# EAGLE board ws2812_Triangle (EAGLE 8.7.1)
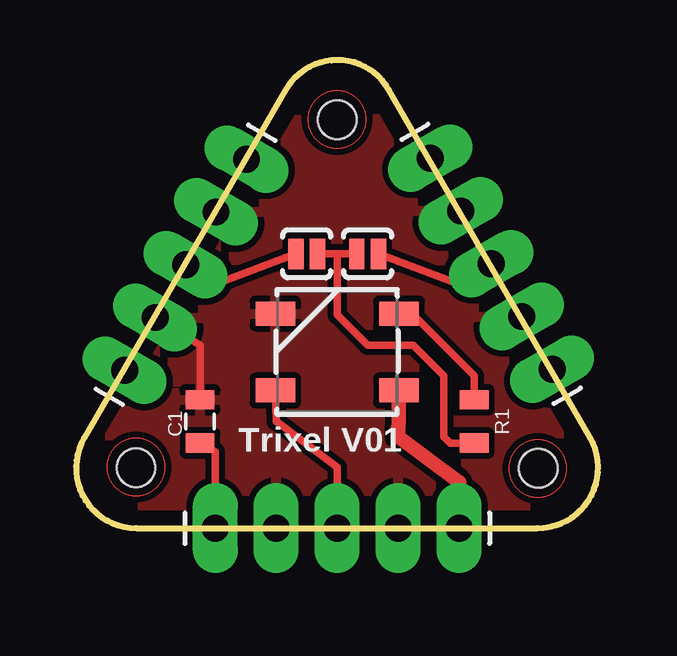
[diagram p0: board, top side]
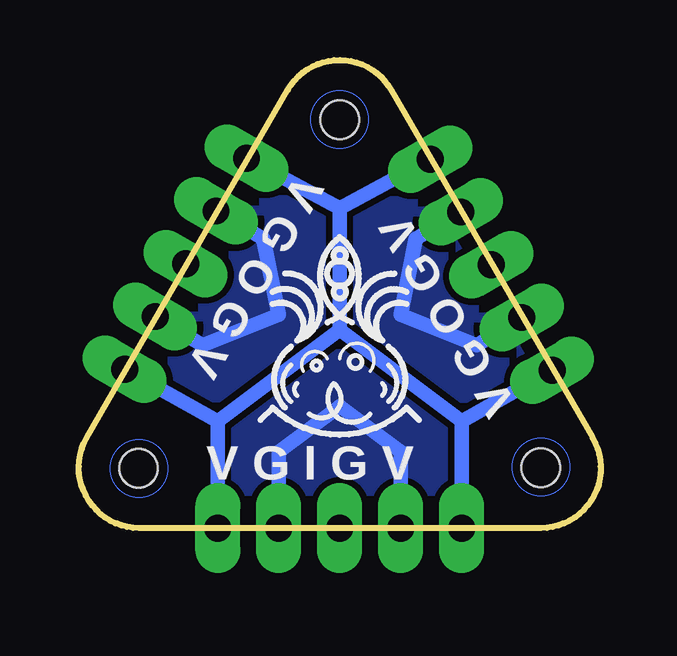
[diagram p1: board, bottom side, seen from below]

Size 21.75 x 19.5 mm. Coordinates in mm from the lower left corner, seen from the top.
Outline: 2.5,0 19.23,0 arc120 21.42,3.76 13.04,18.26 arc121 8.72,18.24 0.34,3.76 arc120 2.5,0
Copper layers (1*16): Top 0.035mm / dielectric 1.5mm / Bottom 0.035mm
Design rules "SeeedStudio_2layer_DRU_no_angle_20140221 *": minimum track width 6mil, minimum drill 12mil, track to track 6mil, track to pad 6mil, pad to pad 6mil, via to via 6mil, smd to smd 0mil, copper to edge 10mil, drill to drill 10mil, minimum pad ring 10mil, minimum via ring 6mil, stop-mask expansion 2mil, vias tented up to drill 20mil, thermal gap 10mil
Holes 1.6 mm at 2.5,2.51 10.88,17.02 19.26,2.49

## Footprints (pad centres in the part's own frame; a part is rotated, then mirrored left to right if it is on the bottom)
0805 = smd 0.8 x 1.2: 1 -0.9,0; 2 0.9,0
WS2812B = smd 1.651 x 1: 1 -2.577,1.6; 2 -2.577,-1.6; 3 2.577,-1.6; 4 2.577,1.6
1X05_LONGPADS = drill 1.118 pad 1.88 long: 1 0,0; 2 2.54,0; 3 5.08,0; 4 7.62,0; 5 10.16,0
PAD-JUMPER-2-NO_YES_SILK = smd 0.635 x 1.27: 1 -0.45,0; 2 0.45,0

## Placement (x,y rotation side)
C1  0.1uF  [0805]  5.16,4.45 270 top
D1  [WS2812B]  10.88,7.34 180 top
J1  [1X05_LONGPADS]  19.84,6.62 120 top
J2  [1X05_LONGPADS]  2.02,6.57 60 top
J4  [1X05_LONGPADS]  5.8,0 0 top
JP1  JUMPER-PAD-2-NOYES_SILK  [PAD-JUMPER-2-NO_YES_SILK]  9.61,11.43 180 top
JP2  JUMPER-PAD-2-NOYES_SILK  [PAD-JUMPER-2-NO_YES_SILK]  12.15,11.43 0 top
R1  1k  [0805]  16.59,4.45 270 top

## Library data of the parts
C1 = SparkFun-Capacitors
D1 = SparkFun-LED; PROD_ID: DIO-12503
J1 J2 J4 = SparkFun-Connectors
JP1 JP2 = SparkFun-Passives
R1 = SparkFun-Resistors

## Nets
DIN: D1.4 J4.3
DOUT: JP1.1 JP2.1 R1.2
GND: C1.1 D1.3 J1.2 J1.4 J2.2 J2.4 J4.2 J4.4
N$1: J1.3 JP2.2
N$2: J2.3 JP1.2
N$3: D1.2 R1.1
VIN: C1.2 D1.1 J1.1 J1.5 J2.1 J2.5 J4.1 J4.5

## Tracks (layer width: path | path; a pad name or v marks a point on that pad's centre or on a via)
DIN
  Top 0.305: J4.3 10.88,2.54 8.34,4.45 D1.4
DOUT
  Top 0.305: R1.2 15.59,3.54 15.32,3.81 15.32,6.35 14.05,7.62 12.15,7.62 10.88,8.89 10.88,11.43 | 10.88,11.43 JP2.1 | 10.88,11.43 JP1.1
GND
  Top 0.305: C1.1 5.16,7.62 J2.2
  Bottom 0.61: J4.2 8.34,3.17 10.88,5.08 13.42,3.17 J4.4 | J2.2 5.16,7.62 8.34,8.89 7.7,12.06 J2.4 | J1.2 16.59,7.62 13.42,8.89 14.05,12.06 J1.4
  pour Bottom (isolate 0.254): 2.62,0.95 19.13,0.95 20.4,3.49 12.46,17.14 9.29,17.14 1.35,3.81
  pour Top (isolate 0.254): 2.62,0.95 19.13,0.95 20.4,3.49 12.46,17.14 9.29,17.14 1.35,3.81
N$1
  Top 0.305: JP2.2 15.96,10.16 J1.3
N$2
  Top 0.305: J2.3 5.8,10.16 JP1.2
N$3
  Top 0.305: R1.1 16.59,6.35 14.05,8.89 D1.2
VIN
  Top 0.305: C1.2 5.8,3.17 J4.1
  Top 0.61: J4.5 15.96,1.91 13.42,3.81 D1.1
  Bottom 0.61: J4.5 15.96,4.45 | 15.96,4.45 J1.1 | J4.1 5.8,4.45 | J2.5 10.88,13.34 | 10.88,13.34 J1.5 | 5.8,4.45 10.88,8.26 | 10.88,8.26 10.88,13.34 | 10.88,8.26 15.96,4.45 | 5.8,4.45 J2.1
(copper drawn outside any net)
  shapes: Bottom circle x3, Top circle x3

## Text on the board
tPlace: Trixel V01
bPlace: V G O G V | V G O G V | V G I G V